# Altium PCB УШЯИ 758727.205-2.PcbDoc (part 3 of 3)
Units mm, origin at the board's own origin, x right, y up, seen from the top; angles counter-clockwise.
Board outline 230 x 150 mm, 2 copper layers (Top Layer, Bottom Layer), stack 1.57 mm thick; 340 components, 190 nets, 1058 pads, 246 vias.
Unrouted connection lines stored in the file: 2.
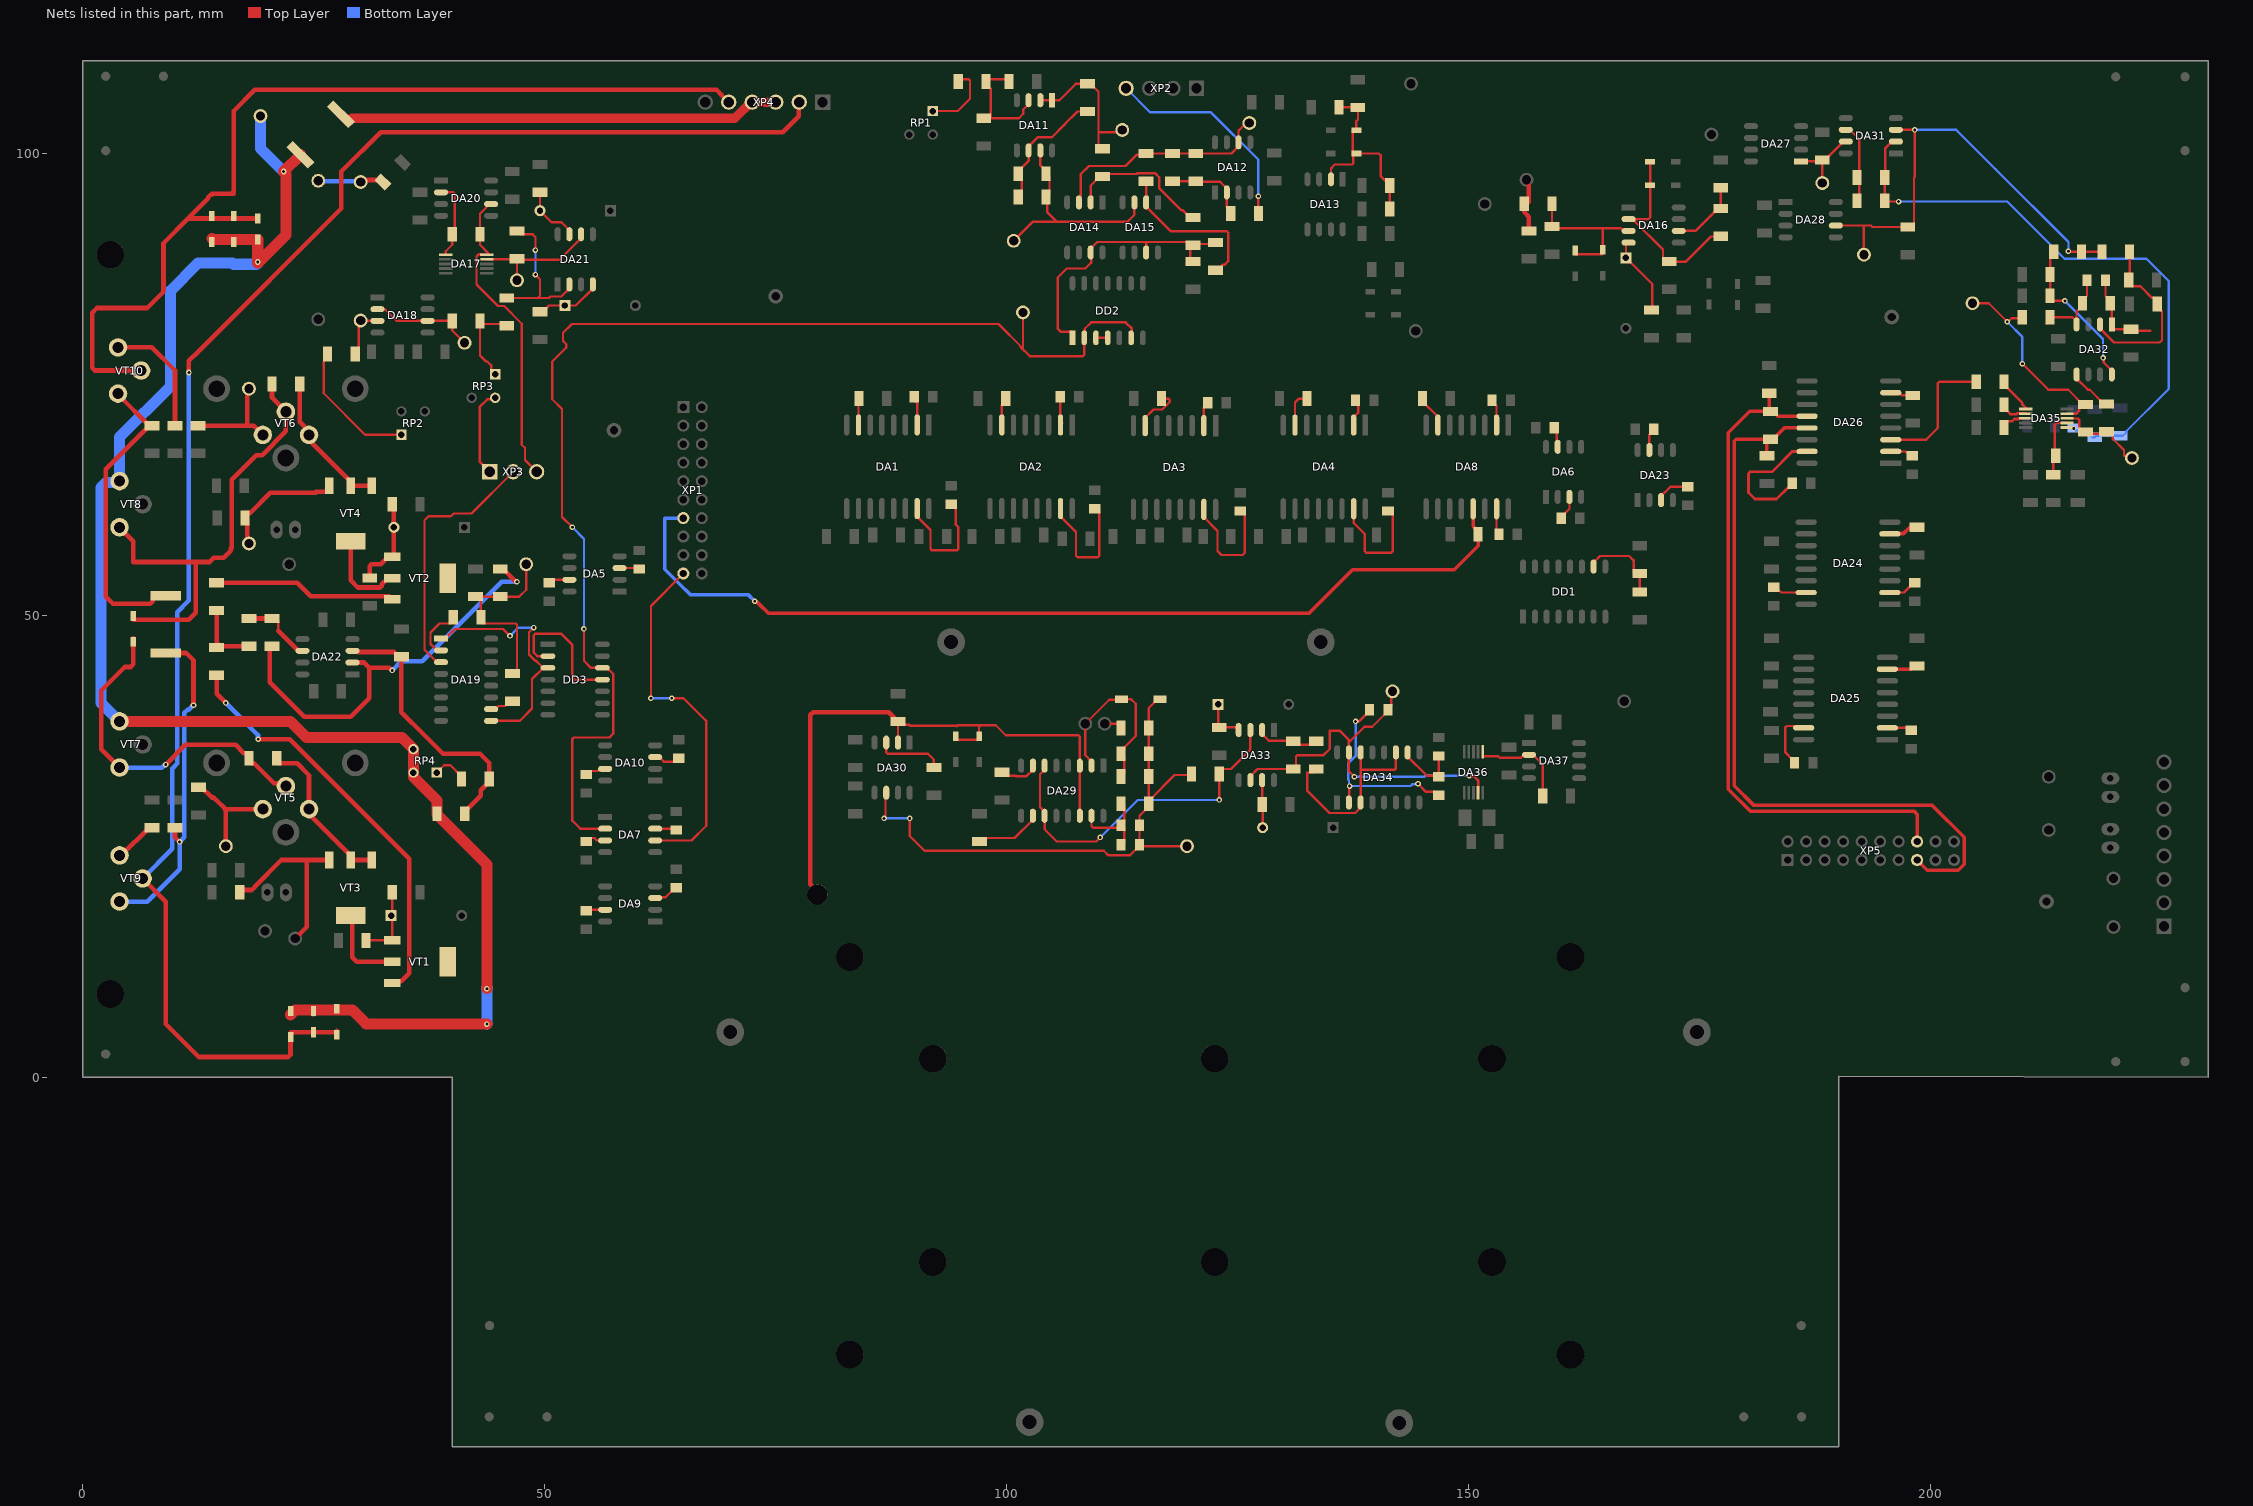
[diagram p3: the nets of this part, all layers, seen from the top]

## Via types
v1: diameter 0.6, hole 0.3, Top Layer to Bottom Layer, 241 vias
v2: diameter 0.5, hole 0.3, Top Layer to Bottom Layer, 3 vias
v3: diameter 1.1, hole 0.8, Top Layer to Bottom Layer, 1 vias
v4: diameter 1.6, hole 0.9, Top Layer to Bottom Layer, 1 vias

## Nets (pads, with @x,y where several pads share a name; then routed paths per layer and width w, separated by ;. In a path a pad name is that pad's centre, name@x,y a point inside that pad or via, vN(x,y) a via of type N, cw(c..) or ccw(c..) an arc to the next point about the centre after c; other vN are vias at no path point) (continued)
LINE-: DA8.13 R17.2 XP1.13 | length 105.2
  Top Layer w0.381: v1(72.725,51.5) 72.767,51.458 72.944,51.458 73.088,51.314 74.227,50.175 132.675,50.175 137.413,54.913 148.414,54.913 151,57.5 R17.2@151,59.05 ; DA8.13@150.46,61.5 150.46,59.59 151.25,58.8 R17.2@151.25,58.75
  Bottom Layer w0.381: XP1.13@65,60.5 63,60.5 63,54.958 63.223,54.735 64.548,53.409 65.733,52.225 72,52.225 v1(72.725,51.5)
Net1: R34.2 R35.1 | length 6.1
  Top Layer w0.5: R34.2@156,94.5 156,93.617 156.5,93.117 R35.1@156.5,91.558 ; R34.2@156.142,94.358 156.482,94.699 156.482,96.606 156.25,96.838 156.25,97.109
Net7: C75.1 | length 2
  Top Layer w0.254: 110.595,38.251 111.985,38.251 112.358,37.878 C75.1@112.358,37.796
Net8: C74.1 C76.1 DA29.2 R82.1 | length 20.2
  Top Layer w0.254: DA29.2@109.175,33.712 109.175,34.171 108.5,34.846 108.5,38.251 111.099,40.85 C74.1@112.2,40.85 ; R82.1@112.358,32.546 112.731,32.919 112.731,34.627 C76.1@112.358,35 112.731,35.373 112.731,35.706 113.95,36.925 113.95,40.406 113.481,40.875 C74.1@112.4,40.875
NetC1_1: C1.1 DA1.15 | length 13.4
  Top Layer w0.254: DA1.15@90.304,61.523 90.25,61.47 90.25,60.719 91.75,59.219 91.75,57.149 91.899,57 94.601,57 94.75,57.149 94.75,59.527 94.498,59.779 94.498,62.002 C1.1@94.25,62.25
NetC2_1: C2.1 DA2.15 | length 13.7
  Top Layer w0.254: DA2.15@105.812,61.523 105.812,60.666 107.5,58.977 107.5,56.399 107.649,56.25 109.851,56.25 110,56.399 110,58.762 109.998,58.764 109.998,61.252 C2.1@109.75,61.5
NetC3_1: C3.1 DA3.15 | length 13
  Top Layer w0.25: DA3.15@121.25,61.25 121.25,60.666 122.809,59.107 122.809,56.941 123.25,56.5 125.5,56.5 125.75,56.75 125.75,60.75 125.75,60.875 125.375,61.25 C3.1@125.25,61.25
NetC4_1: C4.1 DA4.15 | length 12.9
  Top Layer w0.25: DA4.15@137.54,61.5 137.54,59.961 138.75,58.751 138.75,56.896 138.896,56.75 141.604,56.75 141.75,56.896 141.75,60.729 141.75,60.875 141.375,61.25 C4.1@141.25,61.25
NetC5_1: C5.1 DA1.2 | length 2.8
  Top Layer w0.254: C5.1@90,73.232 90.304,72.929 DA1.2@90.304,70.579
NetC6_1: C6.1 DA2.2 | length 2.9
  Top Layer w0.3: C6.1@105.791,73.602 105.791,70.959 DA2.2@106,70.75
NetC7_1: C7.1 DA3.2 | length 2.7
  Top Layer w0.254: DA3.2@121.33,70.5 121.33,72.455 121.75,72.875 C7.1@121.75,73
NetC8_1: C8.1 DA4.2 | length 3
  Top Layer w0.254: DA4.2@137.54,70.556 137.54,71.414 138.015,71.889 138.015,72.985 C8.1@137.75,73.25
NetC9_2: C9.2 DA5.3 | length 2.2
  Top Layer w0.254: DA5.3@58.106,55.09 60.16,55.09 C9.2@60.25,55
NetC10_2: C10.2 DA6.3 | length 2.9
  Top Layer w0.254: C10.2@160,60.25 160,60.625 160.885,61.51 DA6.3@160.885,62.788
NetC11_2: C11.2 DA7.7 | length 2.5
  Top Layer w0.254: DA7.7@61.962,26.885 62.212,26.885 C11.2@64.115,26.885 ; C11.2@64.115,26.885 C11.2@64.25,26.75 C11.2@64.115,26.885
NetC12_1: C12.1 DA8.15 | length 2.9
  Top Layer w0.254: DA8.15@153,61.5 153,59 C12.1@153.25,58.75
NetC13_2: C13.2 DA5.7 | length 2.3
  Top Layer w0.254: C13.2@50.5,53.5 50.82,53.82 DA5.7@52.682,53.82
NetC14_2: C14.2 DA6.7 | length 2.2
  Top Layer w0.254: C14.2@159.25,70.25 159.5,70 159.5,68.996 159.539,68.957 159.539,68.288 DA6.7@159.615,68.212
NetC15_2: C15.2 DA7.3 | length 2.3
  Top Layer w0.254: C15.2@54.5,25.5 54.873,25.873 55.379,25.873 55.383,25.877 55.644,25.615 DA7.3@56.538,25.615
NetC16_1: C16.1 DA8.2 | length 2.7
  Top Layer w0.254: C16.1@152.5,73 152.625,73 153,72.625 DA8.2@153,70.556
NetC17_2: C17.2 DA9.3 | length 2.7
  Top Layer w0.254: DA9.3@61.962,19.385 62.038,19.461 63.086,19.461 64.125,20.5 C17.2@64.25,20.5
NetC18_2: C18.2 DA10.3 | length 2.9
  Top Layer w0.254: DA10.3@61.962,34.635 62.4,34.635 62.9,34.135 64.135,34.135 C18.2@64.5,34.5
NetC19_2: C19.2 DA9.7 | length 2.1
  Top Layer w0.254: C19.2@54.5,18 54.615,18.115 DA9.7@56.538,18.115
NetC20_2: C20.2 DA10.7 | length 2.3
  Top Layer w0.254: C20.2@54.5,32.75 54.873,33.123 55.751,33.123 55.993,33.365 DA10.7@56.538,33.365
NetC21_2: C21.2 DA11.3 R19.1 R20.1 | length 12.5
  Top Layer w0.254: C21.2@97.5,103.75 C21.2@98.25,103.75 ; R20.1@97.75,107.75 98,108 100,108 R19.1@100.25,107.75 ; R20.1@98,107.2 98.25,106.95 C21.2@98.25,103.75 ; DA11.3@102.365,105.712 102.365,105.275 101.791,104.701 101.791,104.248 101.293,103.75 C21.2@98.25,103.75
NetC22_2: C22.2 C25.1 DA13.2 R22.2 R24.1 VD1.1 VD2.2 | length 21.4
  Top Layer w0.254: DA13.2@135.081,97.16 135.081,98.331 135.5,98.75 137.351,98.75 137.5,98.899 VD2.2@137.5,99.75 ; C22.2@135.946,104.948 137.96,104.948 R22.2@137.986,104.923 ; VD2.2@137.446,99.75 137.446,99.948 140.259,99.948 140.486,99.721 140.486,97.453 C25.1@141.446,96.493 R24.1@141.446,93.948 ; VD2.2@137.5,100 137.458,100 137.446,100.012 137.446,102.448 137.752,102.448 137.822,102.518 137.822,103.444 138,103.623 R22.2@138,104.75
NetC23_1: C23.1 DA11.6 R23.2 R26.1 | length 14.5
  Top Layer w0.254: C23.1@101.25,95.25 101.623,95.623 101.623,97.377 R26.1@101.25,97.75 ; R26.1@101.25,97.5 R26.1@101.25,97.75 ; DA11.6@102.344,100.288 102.344,100.705 103.328,101.688 104.872,101.688 106.261,103.077 106.261,103.112 107.649,104.5 R23.2@108.75,104.5 ; DA11.6@102.365,100.288 102.365,99.144 101.644,98.423 101.623,98.423 101.25,98.05 R26.1@101.25,97.75
NetC23_2: C23.2 DA11.7 DA15.3 KT7.1 R26.2 | length 24.3
  Top Layer w0.254: KT7.1@100.75,90.75 101,90.75 102.798,92.548 105.452,92.548 ; DA11.7@103.635,100.288 103.635,98.665 104.25,98.05 R26.2@104.25,97.75 104.623,97.377 104.623,95.623 C23.2@104.25,95.25 104.25,95.081 104.371,94.96 104.371,93.629 105.452,92.548 ; DA15.3@113.811,94.66 113.811,93.311 113.048,92.548 105.452,92.548
NetC24_1: C24.1 DA12.2 R21.2 R25.1 | length 9.1
  Top Layer w0.254: C24.1@117.946,96.948 R25.1@120.446,96.948 120.518,96.876 123.109,96.876 123.811,96.174 123.811,94.165 124.23,93.745 R21.2@124.23,93.445
NetC24_2: C24.2 DA12.6 DA14.3 KT8.1 R25.2 R29.1 | length 24.4
  Top Layer w0.254: DA14.3@107.811,94.986 107.811,95.205 107.993,95.388 107.993,97.695 108.899,98.6 112.848,98.6 114.048,99.801 114.933,99.801 R29.1@115.081,99.948 C24.2@117.946,99.948 R25.2@120.446,99.948 124.306,99.948 125.081,100.723 DA12.6@125.081,101.16 ; DA12.6@125.081,101.16 125.081,102.493 125.156,102.493 125.913,103.25 KT8.1@126.25,103.25
NetC28_2: C28.2 DA16.3 R34.1 VD3.1 VD4.2 | length 16.6
  Top Layer w0.254: R34.1@159,94.5 C28.2@159,92.058 159.283,92.058 159.47,91.871 166.445,91.871 166.743,91.573 DA16.3@167.288,91.573 ; VD3.1@161.5,89.059 164.43,89.059 164.5,89.129 VD4.2@164.5,89.25 ; VD4.2@164.494,89.25 164.494,91.744 164.5,91.75
NetC29_2: C29.2 DD1.10 R33.2 | length 8.9
  Top Layer w0.254: DD1.10@163.5,55.75 163.562,55.75 164.202,56.39 167.36,56.39 167.827,55.923 167.827,54.623 168.2,54.25 R33.2@168.5,54.25 ; C29.2@168.5,52.5 R33.2@168.5,54.25 ; R33.2@168.5,54.5 R33.2@168.5,54.25
NetC30_1: C30.1 DA16.2 R36.1 VD5.2 VD6.1 | length 21.4
  Top Layer w0.254: DA16.2@167.288,92.843 169.444,92.843 169.624,93.023 169.624,98.989 169.635,99 VD6.1@170,99 ; DA16.2@167.726,92.843 171.011,89.557 171.011,88.623 171.384,88.25 R36.1@171.5,88.25 ; R36.1@171.684,88.25 173.5,88.25 176.218,90.968 176.968,90.968 C30.1@177,91
NetC30_2: C30.2 DA16.6 R38.1 | length 7.3
  Top Layer w0.254: DA16.6@172.712,91.573 174.523,91.573 176.95,94 C30.2@177,94 ; C30.2@177.25,94.25 R38.1@177.25,96.25
NetC32_2: C32.2 C33.2 R40.2 | length 7.3
  Top Layer w0.25: R40.2@32.288,97.077 R40.2@32.5,96.865
  Top Layer w0.5: C33.2@30.177,97.077 R40.2@32.288,97.077
  Bottom Layer w0.254: C32.2@25.5,97 C32.2@25.568,96.933 ; C33.2@30.067,96.933 C33.2@30.25,96.75
  Bottom Layer w0.5: C32.2@25.568,96.933 C33.2@30.067,96.933
NetC33_1: C33.1 DA18.3 R41.2 | length 5.7
  Top Layer w0.254: R41.2@29.5,78.25 29.873,78.623 29.873,81.652 C33.1@30.086,81.865 30.102,81.849 31.89,81.849 DA18.3@31.906,81.834
NetC34_1: C34.1 DA17.1 DA20.2 | length 8.5
  Top Layer w0.254: DA20.2@38.788,95.745 40.109,95.745 40.258,95.596 40.258,91.464 C34.1@40,91.206 40,90.065 39.298,89.363 39.298,89.023 DA17.1@39.275,89
NetC34_2: C34.2 DA17.10 DA20.6 XP3.3 | length 34
  Top Layer w0.254: DA17.10@43.478,89.027 42.844,89.027 42.623,88.806 42.623,85.769 44.95,83.443 45.616,83.443 47.526,81.533 47.526,68.441 47.866,68.101 47.866,66.78 XP3.3@49.136,65.51 ; DA17.10@43.725,89 43.851,89 43.828,89.023 43.828,89.236 43,90.065 C34.2@43,91.206 43,93.429 43.699,94.128 43.699,94.292 43.882,94.475 DA20.6@44.212,94.475
NetC37_1: C37.1 KT13.1 R42.2 R43.2 R47.1 | length 20.9
  Top Layer w0.254: C37.1@42.5,52 C37.1@42.727,52 ; R43.2@46.51,43.669 46.627,43.669 47,44.042 47,48.945 46.851,49.094 43.473,49.094 43.1,49.467 43.1,51.627 C37.1@42.727,52 ; KT13.1@48,55.5 48,52.75 47.25,52 R47.1@45.189,52 C37.1@42.727,52
NetC38_2: C38.2 DA21.7 VD10.2 | length 6.5
  Top Layer w0.254: C38.2@49.495,95.745 VD10.2@49.495,93.756 50.747,92.504 51.818,92.504 52.673,91.649 DA21.7@52.673,91.212
NetC39_1: C39.1 DA22.2 R47.2 | length 44.9
  Top Layer w0.5: C39.1@20.5,46.635 20.25,46.385 20.25,42.75 23.996,39.004 29.004,39.004 31,41 31,44.32 ; DA22.2@29.212,44.865 30.455,44.865 31,44.32 ; v1(33.5,44.007) 33.473,44.007 33.16,44.32 31,44.32 ; R47.2@45.189,55 45.489,55 46.879,53.61 v1(47,53.61)
  Bottom Layer w0.5: v1(33.5,44.007) 34.493,45 36.75,45 45.36,53.61 v1(47,53.61)
NetC39_2: C39.2 DA22.6 R51.1 | length 7.8
  Top Layer w0.254: C39.2@20.5,49.635 20.8,49.635 21.173,49.262 21.173,48.313 ; DA22.6@23.35,46.135 DA22.6@23.788,46.135
  Top Layer w0.5: R51.1@18,49.635 C39.2@20.5,49.635 ; 21.173,48.313 DA22.6@23.35,46.135
NetC40_2: C40.2 DA21.4 VD11.1 | length 7.2
  Top Layer w0.254: C40.2@49.5,82.82 49.8,82.82 50.48,83.5 53.362,83.5 55.213,85.351 DA21.4@55.213,85.788
NetC41_1: C41.1 DA22.3 R45.2 R48.1 | length 29.7
  Top Layer w0.5: DA22.3@29.212,46.135 29.649,46.135 29.784,46 33.7,46 34.2,45.5 R45.2@34.5,45.5 34.5,39.5 37,37 39,35 43,35 44,34 R48.1@44,32.25 ; C41.1@41.34,28.5 41.34,28.8 41.59,29.05 41.664,29.05 43.075,30.461 43.075,31.025 R48.1@44,31.95
NetC41_2: C41.2 KT19.1 R64.1 RP4.2 RP4.3 VD15.1 VD16.2 VD17.1 VD18.2 VD19.2 VD20.1 VT7.3 VT8.3 | length 178.9
  Top Layer w1.2: VT7.3@4,38.5 22.5,38.5 24.25,36.75 34.55,36.75 RP4.3@35.8,35.5 RP4.2@35.8,32.96 35.8,32.465 38.34,29.925 C41.2@38.34,28.5 ; VD16.2@14,90.75 14.113,90.637 VD20.1@18.955,90.637 v1@18.955,88.295 ; v1@18.955,88.085 22,91.13 22,97.75 v1(21.75,98) R64.1@23.558,99.808 ; v1(18.955,88.205) v1@18.955,88.295 ; v1@19,88.25 v1@18.955,88.295 ; VD17.1@22.5,6.75 23,7.25 24.89,7.25 VD19.2@25,7.14 25.11,7.25 29.198,7.25 30.698,5.75 v1(43.75,5.75) ; C41.2@38.44,28.3 43.75,22.99 v1(43.75,9.575)
  Bottom Layer w1.2: VT7.3@4,38.5 2,40.5 2,63.797 2.55,64.347 3.847,64.347 VT8.3@4,64.5 4,69.256 9.5,74.756 9.5,85.094 12.491,88.085 16.217,88.085 16.338,87.964 18.834,87.964 v1@18.955,88.085 ; v1@18.75,88 v1(18.955,88.205) ; KT19.1@19.25,104 19.25,100.5 v1(21.75,98) ; v1(43.75,5.75) v1@43.75,9.75
NetC44_1: C44.1 R50.2 VD12.1 VT1.1 | length 8.1
  Top Layer w0.254: R50.2@30.678,14.8 VT1.1@33.5,14.8 VD12.1@33.5,17.487 ; VD12.1@33.387,17.487 33.5,17.6 C44.1@33.5,20
NetC45_2: C45.2 R52.2 VD13.2 VT2.1 | length 10
  Top Layer w0.5: R52.2@31.072,54 31.072,55.312 31.251,55.49 32.24,55.49 33.05,56.3 VT2.1@33.5,56.3 33.687,56.487 VD13.2@33.687,59.5 33.687,61.813 C45.2@33.5,62
NetC48_1: C48.1 VT1.2 VT1.4 VT3.1 VT3.2 VT3.4 VT5.1 | length 26.9
  Top Layer w0.5: C48.1@21,34.5 21,34.25 21.25,34 21.25,33.95 23.207,33.95 24.5,32.657 VT5.1@24.5,29 24.787,28.713 24.787,28.163 29,23.95 VT3.2@29,23.5 VT3.1@31.3,23.5 ; VT3.4@29,17.5 29.182,17.318 29.182,15.311 29.178,15.306 29.178,13.394 29.182,13.39 29.182,12.969 29.651,12.5 VT1.2@33.5,12.5
NetC48_2: C48.2 VD14.2 VT5.2 VT7.1 | length 37.8
  Top Layer w0.5: VT7.1@4,33.5 2,35.5 2,41.845 4.541,44.385 5.199,44.385 5.5,44.687 ; 5.5,44.75 VD14.2@5.5,47.5 ; v1(9,33.827) 11.123,35.95 16.55,35.95 17.45,35.05 17.75,35.05 18,34.8 C48.2@18,34.5 18,34.2 18.25,33.95 18.55,33.95 20.713,31.787 21.713,31.787 VT5.2@22,31.5
  Bottom Layer w0.5: VT7.1@4,33.5 8.579,33.5 8.906,33.827 v1(9,33.827)
NetC49_1: C49.1 VT2.2 VT2.4 VT4.1 VT4.2 VT4.4 VT6.1 | length 25.2
  Top Layer w0.5: C49.1@23.5,75 23.5,70.906 24.5,69.906 VT6.1@24.5,69.5 24.834,69.166 24.834,68.616 29,64.45 VT4.2@29,64 VT4.1@31.3,64 ; VT4.4@29,58 29,53.762 29.777,52.985 32.219,52.985 32.368,53.134 32.368,53.318 33.05,54 VT2.2@33.5,54
NetC49_2: C49.2 VD14.1 VT6.2 VT8.1 | length 49.7
  Top Layer w0.5: VT8.1@3.75,59.75 5.5,58 5.5,55.75 12.25,55.75 ; VD14.1@5.554,49.5 11.5,49.5 12.25,50.25 12.25,55.75 ; 16.044,57.25 16.044,56.962 15.283,56.2 14.206,56.2 13.756,55.75 12.25,55.75 ; 16.155,57.25 16.155,64.662 18.792,67.299 19.421,67.299 22,69.879 VT6.2@22,72 20.5,73.5 C49.2@20.5,75
NetC52_2: C52.2 DA23.3 | length 3.7
  Top Layer w0.254: DA23.3@170.803,62.438 170.803,62.875 171.803,63.875 C52.2@173.668,63.875
NetC53_1: C53.1 DA24.15 | length 3.1
  Top Layer w0.25: C53.1@183.5,52.75 183.81,52.44 DA24.15@186.5,52.44
NetC54_1: C54.1 DA25.15 | length 5.8
  Top Layer w0.254: C54.1@185.25,34 185,34.25 185,34.375 184.25,35.125 184.25,37.851 184.399,38 DA25.15@185.75,38
NetC55_1: C55.1 DA26.15 | length 15.2
  Top Layer w0.3: C55.1@185,64.25 185,64.125 184.65,63.775 184.525,63.775 183.306,62.556 182.708,62.556 180.944,62.556 180.25,63.25 180.25,65.324 180.426,65.5 182.783,65.5 184.993,67.71 DA26.15@186.601,67.71
NetC56_2: C56.2 DA23.7 | length 2.6
  Top Layer w0.25: DA23.7@169.533,67.862 169.533,69.533 169.875,69.875 C56.2@169.875,70.3
NetC57_1: C57.1 DA24.2 | length 3.4
  Top Layer w0.254: DA24.2@195.556,52.44 197.086,52.44 197.752,53.106 197.752,53.127 198.125,53.5 C57.1@198.5,53.5
NetC58_1: C58.1 DA25.2 | length 2.2
  Top Layer w0.3: DA25.2@195.75,37.75 195.8,37.8 197.6,37.8 C58.1@197.85,37.55
NetC59_1: C59.1 DA26.2 | length 2.5
  Top Layer w0.254: DA26.2@195.657,67.71 197.24,67.71 197.327,67.623 197.627,67.623 C59.1@198,67.25
NetC64_1: 
NetC64_2: 
NetC65_1: 
NetC65_2: 
NetC66_2: C71.2 DA29.3 DA29.14 DA30.2 pad.2 VD23.2 VD24.1 | length 64.8
  Top Layer w0.254: DA30.2@88.23,36.213 C71.2@88.23,38.5 88.603,38.127 89.443,38.127 89.538,38.032 94.527,38.032 94.595,37.963 94.708,38.077 97.095,38.077 ; VD24.1@94.5,36.5 96.936,36.5 VD23.2@96.968,36.532 ; VD23.2@97,36.5 97,38 ; 97.095,37.963 97.095,38.077 ; DA29.14@107.905,28.288 DA29.3@107.905,33.712 107.905,36.851 107.756,37 99.881,37 98.804,38.077 97.095,38.077
  Top Layer w0.5: pad.2@79.5,19.75 79.5,20.143 78.75,20.893 78.75,39.207 79.043,39.5 87.25,39.5 C71.2@88,38.75
NetC68_2: 
NetC70_1: C70.1 DA27.1 DA31.7 KT22.1 | length 8.4
  Top Layer w0.254: DA27.1@185.962,99.095 187.655,99.095 C70.1@187.75,99 ; KT22.1@188,96.75 188.25,97 C70.1@188.25,99.25 188.55,99.25 190.275,100.975 DA31.7@190.275,101.059 ; DA31.7@190.75,101.25 190.466,101.25 DA31.7@190.275,101.059 ; DA31.7@190.788,101.241 190.458,101.241 DA31.7@190.275,101.059
NetC72_2: C72.2 DA28.6 DA31.3 KT23.1 R84.1 R85.1 | length 50.2
  Top Layer w0.254: DA28.6@189.707,92.15 192.75,92.15 ; KT23.1@192.75,89.25 192.75,92.15 ; DA31.3@196.212,102.511 198.239,102.511 v1(198.25,102.5) 198.254,102.496 198.254,97.397 198.173,97.316 198.173,92.373 197.55,91.75 C72.2@197.5,91.75 ; C72.2@197.5,92 193.652,92 193.502,92.15 192.75,92.15 ; v1(214.879,89.367) 214.922,89.323 R85.1@216.295,89.323 R84.1@218.5,89.323
  Bottom Layer w0.254: v1(198.25,102.5) 202.75,102.5 207,98.25 214.879,90.371 v1(214.879,89.367)
NetC73_1: C73.1 C87.2 C89.2 C92.2 DA31.2 DA35.1 R86.2 | length 66.4
  Top Layer w0.254: DA31.2@196.212,101.241 195.775,101.241 195.073,100.539 195.073,97.323 195,97.25 R86.2@195,94.845 195.095,94.75 v1(196.5,94.75)
  Bottom Layer w0.254: v1(196.5,94.75) 208.25,94.75 214.452,88.548 223.318,88.548 225.75,86.117 225.75,74.5 221.133,69.883 221.133,69.773 220.76,69.4 217.881,69.4 C92.2@217.731,69.25 217.431,69.25 216.699,69.982 215.663,69.982 C87.2@215.395,70.25 215.179,70.25 C87.2@215.175,70.246
  other v2: 215.45,70.196
NetC73_2: C73.2 DA31.6 R86.1 | length 8.1
  Top Layer w0.254: DA31.6@191.225,102.511 192.25,101.487 192.25,97.895 C73.2@192,97.645 ; R86.1@192,94.845 192.25,95.095 192.25,97.095 C73.2@192,97.345
NetC74_2: C74.2 C75.2 C76.2 C77.2 C78.2 DA30.6 KT24.1 R82.2 R83.2 R89.1 | length 61.5
  Top Layer w0.254: v1(86.73,28.001) 86.884,28.155 86.884,30.713 DA30.6@86.96,30.789 ; v1(89.5,28.001) 89.5,26.096 91.096,24.5 110.5,24.5 111,24 113.358,24 113.358,24.037 114.358,25.037 C78.2@114.358,25.162 ; C74.2@116.475,40.725 116.15,40.725 115.358,39.933 C75.2@115.358,37.796 C76.2@115.358,35 R82.2@115.358,32.546 R83.2@115.358,29.892 ; KT24.1@119.5,25.25 119.25,25 114.521,25 C78.2@114.358,25.162 ; R89.1@119.9,32.7 118.167,32.7 R83.2@115.358,29.892 ; C78.2@114.358,25.162 C77.2@114.358,27.267 114.358,28.292 115.358,29.292 R83.2@115.358,29.592 R83.2@115.358,29.892
  Bottom Layer w0.254: v1(86.73,28.001) v1(89.5,28.001)
NetC77_1: C77.1 C78.1 DA29.15 R83.1 | length 9.5
  Top Layer w0.254: DA29.15@109.175,28.288 109.175,27.149 109.324,27 112.092,27 C77.1@112.358,27.267 ; C78.1@112.358,25.162 112.731,25.535 112.731,26.894 C77.1@112.358,27.267 ; R83.1@112.358,29.592 112.731,29.219 112.731,27.639 C77.1@112.358,27.267
NetC81_1: C81.1 DA32.2 R84.2 R87.1 | length 19.6
  Top Layer w0.254: DA32.2@218.299,81.462 218.299,81.024 219.824,79.5 224.75,79.5 225,79.75 225,82.845 224.158,83.687 224.158,84.287 224.122,84.323 223.927,84.323 222.673,85.577 221.768,85.577 221.395,85.95 R87.1@221.395,86.25 221.5,86.355 R84.2@221.5,89.323
NetC82_2: C82.2 DA32.8 R85.2 R88.2 | length 16.9
  Top Layer w0.254: R85.2@213.09,89.408 213.09,88.818 212.895,88.623 R88.2@212.895,86.85 C82.2@212.895,84.55 212.895,84.373 213.268,84 v1(214.5,84) ; v1(218.624,77.83) 218.69,77.764 218.69,77.354 219.569,76.476 DA32.8@219.569,76.038
  Bottom Layer w0.254: v1(214.5,84) 218.624,79.876 v1(218.624,77.83)
NetC83_1: C83.1 DA32.1 R90.2 R92.1 | length 9.6
  Top Layer w0.254: C83.1@218.895,86.25 218.895,84.55 219.395,84.05 R92.1@219.395,83.75 219.569,83.576 219.569,81.128 219.767,80.93 R90.2@221.663,80.93 ; R90.2@221.75,80.75 223.75,80.75
NetC83_2: C83.2 DA32.4 R92.2 R99.1 | length 9.1
  Top Layer w0.254: R99.1@212.522,81.551 212.895,81.924 R99.1@212.895,82.224 215.327,82.224 DA32.4@215.759,81.792 ; DA32.4@215.759,81.462 DA32.4@215.759,81.792 ; C83.2@216.895,86.25 216.895,84.55 216.395,84.05 R92.2@216.395,83.75 216.395,83.45 215.759,82.814 DA32.4@215.759,81.792
NetC84_2: C84.2 DA33.4 VD26.1 | length 4.8
  Top Layer w0.254: VD26.1@122.877,40.347 122.877,37.97 C84.2@123,37.847 124.912,37.847 125.095,37.664 DA33.4@125.095,37.559
NetC85_2: C85.2 DA33.7 VD25.2 | length 5.2
  Top Layer w0.254: DA33.7@127.635,32.135 C85.2@127.635,29.5 127.687,29.448 VD25.2@127.687,27
NetC86_1: C86.1 DA33.2 R91.1 | length 6.9
  Top Layer w0.254: DA33.2@127.635,37.559 127.635,37.121 128.341,36.415 130.932,36.415 C86.1@131,36.347 131.3,36.347 131.673,35.974 132.627,35.974 ; 132.627,35.974 133.127,35.974 R91.1@133.5,36.347
NetC86_2: C86.2 DA33.6 DA34.15 DA36.9 KT25.1 R96.2 | length 43
  Top Layer w0.254: DA33.6@126.365,32.135 126.365,32.572 127.139,33.347 131.3,33.347 131.3,34.698 131.449,34.847 134.275,34.847 134.947,35.519 134.947,37.5 135.991,37.5 137.022,36.468 137.022,36.25 ; v1(137.615,32.5) 137.022,33.093 DA34.15@137.022,35.15 137.022,36.25 ; KT25.1@141.75,41.75 141.623,41.623 141.623,40.248 141.551,40.176 140.949,40.176 140.949,39.324 139.552,37.927 138.699,37.927 137.022,36.25 ; v1(150.049,32.606) 150.115,32.54 150.577,32.54 151,32.118 DA36.9@151,30.775
  Bottom Layer w0.254: v1(137.615,32.5) 145.157,32.5 145.263,32.606 v1(150.049,32.606)
NetC90_1: C90.1 DA35.4 KT27.1 R99.2 | length 22.6
  Top Layer w0.254: KT27.1@204.5,83.75 206.25,83.75 v1(208.25,81.75) 208.344,81.75 208.723,82.129 209.8,82.129 R99.2@209.895,82.224 ; v1(209.895,77.191) 212.713,74.373 214.858,74.373 C90.1@216.431,72.8 ; DA35.4@214.725,71.796 215.205,71.796 215.232,71.769 215.7,71.769 216.058,72.127 216.058,72.427 C90.1@216.431,72.8 ; C90.1@216.731,72.8 C90.1@216.431,72.8
  Bottom Layer w0.254: v1(208.25,81.75) 209.895,80.105 v1(209.895,77.191)
NetC90_2: C90.2 DA35.3 KT26.1 R95.2 | length 10.1
  Top Layer w0.254: DA35.3@214.725,71.296 214.992,71.296 215.023,71.265 215.879,71.265 215.894,71.25 215.945,71.25 216.058,71.137 216.058,70.173 216.431,69.8 C90.2@216.731,69.8 216.895,69.637 218.786,69.637 R95.2@219,69.85 ; R95.2@219,69.75 219.4,69.75 219.673,69.477 219.673,69.077 220.888,67.862 220.888,67.233 221.517,67.233 KT26.1@221.75,67
NetC93_1: C93.1 DA35.2 R101.1 | length 7
  Top Layer w0.254: C93.1@213.229,65.176 213.229,66.979 R101.1@213.5,67.25 213.395,67.355 213.395,70.601 213.59,70.796 DA35.2@214.725,70.796
NetC96_1: C96.1 DA36.1 DA37.2 | length 10.4
  Top Layer w0.254: 151.65,34.721 153.17,34.721 153.334,34.556 155.637,34.556 155.969,34.888 DA37.2@156.513,34.888 156.951,34.888 158,33.838 C96.1@158,30.437
NetDA1_7: DA1.7 R13.2 | length 2.7
  Top Layer w0.254: DA1.7@83.954,70.579 83.954,73.171 R13.2@84.015,73.232
NetDA2_7: DA2.7 R14.2 | length 3
  Top Layer w0.254: DA2.7@99.462,70.579 99.462,72.691 99.898,73.127 R14.2@99.898,73.427
NetDA3_7: DA3.7 R15.2 | length 5.4
  Top Layer w0.254: DA3.7@114.98,70.5 114.98,71.358 115.866,72.244 116.817,72.244 117.641,73.068 117.641,73.278 117.492,73.427 R15.2@116.741,73.427
NetDA4_7: DA4.7 R16.2 | length 3.9
  Top Layer w0.254: DA4.7@131.19,70.556 131.19,72.999 131.618,73.427 R16.2@132.499,73.427
NetDA8_7: DA8.7 R18.2 | length 3.4
  Top Layer w0.254: R18.2@145,73.25 145,73.108 146.65,71.458 DA8.7@146.65,70.556
NetDA11_1: DA11.1 DA11.2 KT6.1 R23.1 R28.1 | length 16.5
  Top Layer w0.254: DA11.2@103.635,105.712 DA11.1@104.905,105.712 105.696,105.712 107.484,107.5 109.05,107.5 109.927,106.623 109.927,102.324 ; R28.1@110.351,100.448 110.3,100.448 109.927,100.821 109.927,102.324 ; KT6.1@112.5,102.5 112.262,102.262 111.513,102.262 111.49,102.238 111.478,102.25 110.001,102.25 109.927,102.324
NetDA14_2: DA14.2 R28.2 R30.1 | length 16.1
  Top Layer w0.254: DA14.2@109.081,94.66 109.081,96.478 110.051,97.448 R28.2@110.351,97.448 110.626,97.723 114.022,97.723 114.124,97.825 116.037,97.825 116.486,97.377 116.486,96.211 118.902,93.794 119.075,93.794 119.848,93.021 R30.1@120.148,93.021
NetDA14_7: DA14.7 DA15.7 DD2.1 R30.2 R31.2 R32.1 | length 31.6
  Top Layer w0.25: DD2.1@107.03,80.582 107.03,80.082 DD2.1@107.112,80
  Top Layer w0.254: DD2.1@107.03,80.582 106.939,80.673 105.827,80.673 105.5,81 105.5,86.5 106.5,87.5 108.5,87.5 109.125,88.125 DA14.7@109.125,89.1 ; DA14.7@109.081,89.236 109.081,89.674 109.783,90.376 114.944,90.376 ; DA15.7@115.081,89.236 115.081,90.239 114.944,90.376 ; R32.1@120.821,87.877 120.448,88.25 R32.1@120.148,88.25 119.848,88.55 119.848,89.721 R30.2@120.148,90.021 ; R31.2@122.586,90.31 122.424,90.148 120.275,90.148 R30.2@120.148,90.021 ; 114.944,90.376 119.793,90.376 R30.2@120.148,90.021
NetDA15_2: DA15.2 R29.2 R31.1 | length 17.7
  Top Layer w0.254: R29.2@115.081,96.948 DA15.2@115.081,94.66 115.081,94.223 117.783,91.521 123.818,91.521 123.967,91.372 123.967,88.303 123.563,87.899 123.363,87.899 123.259,87.794 123.259,87.683 122.886,87.31 R31.1@122.586,87.31
NetDA16_4: DA16.4 R37.2 VD7.1 | length 9.1
  Top Layer w0.254: R37.2@169.75,83 169.836,83.086 169.836,85.822 168.595,87.064 VD7.1@167,88.658 DA16.4@167,90.12 ; DA16.4@167,90.12 DA16.4@167.183,90.303 ; DA16.4@167,90.12 DA16.4@167.183,90.303 ; DA16.4@167.183,90.303 DA16.4@167.288,90.303 DA16.4@167.183,90.303
NetDA17_9: DA17.9 DA21.6 KT14.1 R49.1 | length 13.8
  Top Layer w0.254: DA17.9@43.725,88.5 R49.1@46.935,88.5 ; KT14.1@47,86.226 47,88.282 R49.1@47.141,88.423 ; R49.1@47,88.565 47.1,88.465 51.633,88.465 53.943,90.774 DA21.6@53.943,91.212
NetDA18_2: DA18.2 DA18.6 KT12.1 R44.2 | length 11.5
  Top Layer w0.254: DA18.2@31.906,83.104 32.725,83.104 33.995,81.834 DA18.6@37.33,81.834 R44.2@40,81.834 40,80.8 KT12.1@41.335,79.465
NetDA19_1: DA19.1 DA19.9 DD3.3 | length 27
  Top Layer w0.254: DA19.1@39.225,47.445 40.28,48.5 45.5,48.5 v1(46.25,47.75) ; DA19.9@44.212,38.555 47.305,38.555 48.635,39.885 48.635,43.075 49.85,44.29 DD3.3@50.35,44.29 ; v1(48.808,48.649) 48.306,48.147 48.306,45.731 48.994,45.044 49.096,45.044 49.89,44.25 DD3.3@50.5,44.25
  Bottom Layer w0.254: v1(46.25,47.75) 47.149,48.649 v1(48.808,48.649)
NetDA19_2: DA19.2 R42.1 | length 6
  Top Layer w0.254: DA19.2@38.788,46.175 38.35,46.175 37.648,46.877 37.648,48.127 38.615,49.094 39.727,49.094 40.1,49.467 R42.1@40.1,49.767
NetDA19_3: DA19.3 XP3.2 | length 28.1
  Top Layer w0.254: DA19.3@38.788,44.905 38.35,44.905 37,46.256 37,60.26 37.434,60.694 39.868,60.694 40.17,60.995 42.081,60.995 XP3.2@46.596,65.51
NetDA19_10: DA19.10 R43.1 | length 2.6
  Top Layer w0.254: DA19.10@44.212,39.825 44.653,39.825 44.996,40.169 45.71,40.169 46.21,40.669 R43.1@46.51,40.669
NetDA21_2: DA21.2 R46.1 R49.2 | length 16.8
  Top Layer w0.254: R46.1@45.906,84.32 49.265,84.32 ; R49.2@47,91.565 47.373,91.192 48.703,91.192 49,90.895 v1(49,89.5) ; v1(49,86.85) 49.5,86.35 49.5,84.555 49.265,84.32 ; DA21.2@52.673,85.788 52.673,85.351 51.799,84.477 50.611,84.477 50.453,84.32 49.265,84.32
  Bottom Layer w0.254: v1(49,86.85) v1(49,89.5)
NetDA24_7: DA24.7 R72.2 | length 3.2
  Top Layer w0.381: DA24.7@195.556,58.79 196.414,58.79 196.452,58.828 197.028,58.828 197.7,59.5 R72.2@198.5,59.5
NetDA25_7: DA25.7 R73.2 | length 3.4
  Top Layer w0.381: DA25.7@195.286,44.15 197.85,44.15 198.2,44.5 R73.2@198.5,44.5
NetDA26_7: DA26.7 R74.2 | length 2.5
  Top Layer w0.25: DA26.7@195.657,74.06 196.565,74.06 196.85,73.775 R74.2@198.025,73.775
NetDA29_6: DA29.6 DA29.11 DA33.3 R89.2 | length 38.1
  Top Layer w0.254: DA29.6@104.095,33.712 104.095,33.274 103.595,32.775 103.595,29.226 104.095,28.725 104.095,26.825 105.416,25.504 109.682,25.504 v1(110.12,25.942) ; v1(123,30) 123,32.502 123,32.974 123.373,33.347 124.267,33.347 126.365,35.445 DA33.3@126.365,37.559
  Bottom Layer w0.254: v1(110.12,25.942) 114.178,30 v1(123,30)
NetDA29_7: DA29.7 R93.1 | length 4.2
  Top Layer w0.254: R93.1@99.5,33 99.8,33 100.173,32.627 100.982,32.627 101.037,32.573 102.123,32.573 102.825,33.274 DA29.7@102.825,33.712
NetDA29_10: DA29.10 R94.1 | length 7.2
  Top Layer w0.254: R94.1@97.05,25.5 97.5,25.5 97.873,25.873 100.835,25.873 102.825,27.863 DA29.10@102.825,28.288
NetDA30_3: DA30.3 R81.2 | length 7.4
  Top Layer w0.254: DA30.3@86.96,36.213 86.96,35.153 87.109,35.004 91.473,35.004 92.095,34.382 92.095,33.532 R81.2@92.126,33.501
NetDA32_5: DA32.5 R95.1 | length 4.5
  Top Layer w0.254: DA32.5@215.759,76.038 215.759,75.601 216.986,74.374 217.176,74.374 R95.1@218.7,72.85
NetDA34_2: DA34.2 R96.1 R97.2 | length 21.6
  Top Layer w0.254: DA34.2@137.022,29.726 137.06,29.764 137.06,31.462 v1(137.098,31.5) ; v1(137.75,38.5) 138.125,38.5 139.25,39.625 R96.1@139.25,39.75 ; v1(144.5,31.75) 145.377,30.873 146.252,30.873 146.625,30.5 R97.2@146.75,30.5
  Bottom Layer w0.254: v1@137,31.5 137.032,31.532 137.032,32.126 136.938,32.22 136.938,33.951 137.75,34.762 v1(137.75,38.5) ; v1(137.098,31.5) 143.692,31.5 143.876,31.684 144.434,31.684 v1(144.5,31.75)
NetDA34_3: DA34.3 DA34.11 DA34.14 R91.2 | length 21.8
  Top Layer w0.254: R91.2@133.5,33.347 133.127,32.974 132.5,32.974 132.5,31.015 134.932,28.583 137.714,28.583 138.063,28.932 138.063,28.952 138.292,29.182 138.292,33.25 ; DA34.14@138.292,35.15 138.292,33.25 ; DA34.11@142.102,35.15 142.102,33.399 141.954,33.25 138.292,33.25
NetDA34_10: DA34.10 R97.1 R98.2 | length 7
  Top Layer w0.254: DA34.10@143.372,35.15 143.372,34.713 145.462,32.623 146.627,32.623 R97.1@146.75,32.5 R98.2@146.75,34.75
NetDA35_6: DA35.6 R104.1 | length 3.9
  Top Layer w0.254: R104.1@207.895,75.25 207.895,74.95 209.895,72.95 209.895,72.777 210.252,72.42 210.252,72.319 DA35.6@210.275,72.296
NetDA35_7: DA35.7 R103.1 | length 3
  Top Layer w0.254: R103.1@207.895,72.75 207.895,72.45 208.595,71.75 209.252,71.75 209.324,71.823 210.275,71.823 DA35.7@210.275,71.796
NetDA35_8: DA35.8 R102.1 | length 3
  Top Layer w0.254: R102.1@207.895,70.296 207.895,70.596 208.268,70.969 208.783,70.969 209.06,71.246
  Top Layer w0.3: 209.06,71.223 209.47,71.223 209.543,71.296 DA35.8@210.275,71.296
NetDD2_3: DD2.3 DD2.4 | length 1.3
  Top Layer w0.254: DD2.3@109.652,80 DD2.4@110.922,80
NetDD3_2: DD3.2 DD3.11 | length 15.2
  Top Layer w0.254: DD3.2@50.35,45.56 49.19,45.56 48.81,45.94 48.81,47.81 49,48 51.75,48 53,46.75 53,43.25 53.23,43.02 DD3.11@56.25,43.02
NetKT16_1: KT16.1 R56.2 VT4.3 | length 13.8
  Top Layer w0.5: KT16.1@17.809,57.816 17.809,60.264 R56.2@17.573,60.5 17.573,60.8 17.823,61.05 18.123,61.05 20.323,63.25 25.25,63.25 ; 25.25,63.35 26.5,63.35 26.7,63.55 VT4.3@26.7,64
NetKT17_1: KT17.1 R57.1 VT5.3 | length 12
  Top Layer w0.5: R57.1@12.55,31.375 12.85,31.375 13.957,30.268 14.157,30.268 14.375,30.05 14.425,30.05 15.5,28.975 KT17.1@15.5,25 ; 15.4,29 17.175,29 VT5.3@19.5,29
NetKT18_1: KT18.1 R58.2 VT6.3 | length 11.5
  Top Layer w0.5: R58.2@12.5,70.5 17.83,70.5 ; KT18.1@18,74.5 17.83,74.33 17.83,70.5 ; VT6.3@19.5,69.5 18.5,70.5 17.83,70.5
NetR20_2: R20.2 RP1.1 | length 8
  Top Layer w0.254: RP1.1@92,104.54 94.689,104.54 96.03,105.881 96.03,107.851 95.881,108 95,108 R20.2@94.75,107.75
NetR21_1: R21.1 XP2.4 | length 23.3
  Top Layer w0.254: R21.1@127.23,93.445 v1(127.23,95.325)
  Bottom Layer w0.254: XP2.4@112.92,107 115.52,104.4 122.1,104.4 127.23,99.27 v1(127.23,95.325)
NetR41_1: R41.1 RP2.1 | length 14.7
  Top Layer w0.254: R41.1@26.5,78.25 26.127,77.877 26.127,77.461 26.094,77.428 26.094,74 30.594,69.5 RP2.1@34.5,69.5
NetR44_1: R44.1 R46.2 RP3.1 | length 9.7
  Top Layer w0.254: RP3.1@44.64,76.046 44.207,76.479 44.207,77.027 43.79,77.444 43.651,77.444 43,78.094 R44.1@43,81.834 43.334,81.5 45.726,81.5 R46.2@45.906,81.32
NetR48_2: R48.2 RP4.1 | length 3.8
  Top Layer w0.254: RP4.1@38.34,32.96 39.132,33.752 39.798,33.752 41,32.55 R48.2@41,32.25
NetR51_2: R51.2 R54.1 R55.2 | length 7.2
  Top Layer w0.5: R55.2@14.5,50.5 14.5,47 14.865,46.635 R51.2@18,46.635
NetR53_2: R53.2 VT3.3 | length 20.5
  Top Layer w0.5: R53.2@16.75,20 17.004,20.254 18.315,20.254 18.616,20.556 18.616,20.616 21.5,23.5 24.25,23.5 ; 23,15 24.25,16.25 24.25,23.5 ; VT3.3@26.75,23.5 24.25,23.5
NetR54_2: R54.2 VT1.3 | length 45.2
  Top Layer w0.5: R54.2@14.5,43.5 14.5,41.5 v1(15.5,40.5) ; v1(19,36.577) 22.423,36.577 35.353,23.647 35.353,11.253 34.5,10.4 33.7,10.4 VT1.3@33.5,10.2
  Bottom Layer w0.5: v1(15.5,40.5) 18.981,37.019 18.981,36.596 v1(19,36.577)
NetR55_1: R55.1 VT2.3 | length 19.7
  Top Layer w0.5: R55.1@14.5,53.5 23.212,53.5 24.689,52.023 33.177,52.023 VT2.3@33.5,51.7
NetR59_1: R59.1 R61.2 VT10.1 | length 33
  Top Layer w0.5: VT10.1@3.832,73.963 3.832,73.868 R61.2@7.2,70.5 ; R61.2@7.5,70.5 R61.2@7.2,70.5 ; R59.1@9,52.1 7.85,52.1 7.6,51.85 7.6,51.506 7.307,51.213 3.287,51.213 2.5,52 2.5,65.8 R61.2@7.2,70.5
NetR59_2: R59.2 R60.1 VT9.1 | length 36.4
  Top Layer w0.5: R59.2@9,45.9 11.207,45.9 12,45.107 v1(12,40.25) ; R60.1@10,27 10,25.95 v1(10.5,25.45)
  Bottom Layer w0.5: VT9.1@4,19 7,19 10.5,22.5 v1(10.5,25.45) 11,25.95 11,39.411 11.354,39.765 11.488,39.765 11.973,40.25 v1(12,40.25)
NetR62_1: R62.1 VT9.3 | length 4.7
  Top Layer w0.5: VT9.3@4,24 4.2,24 7.2,27 R62.1@7.5,27
NetR63_2: R63.2 VT10.3 | length 13.2
  Top Layer w0.5: VT10.3@3.832,78.963 7.5,78.963 10,76.463 R63.2@10,70.5
NetR64_2: R64.2 XP4.3 XP4.4 | length 48.3
  Top Layer w1: R64.2@27.942,104.192 28.755,103.379 29.126,103.75 70.572,103.75 72.322,105.5 XP4.3@75,105.5
NetRP3_2: RP3.2 XP3.1 | length 9.5
  Top Layer w0.254: XP3.1@44.056,65.51 42.96,66.606 42.96,72.514 43.787,73.341 44.474,73.341 RP3.2@44.64,73.506
NetVD15_2: VD15.2 VD17.2 VD19.1 VT9.2 XP4.2 | length 177.4
  Top Layer w0.5: VT9.2@6.5,21.5 9,19 9,5.75 12.563,2.187 22.251,2.187 22.5,2.436 VD17.2@22.5,4.497 ; v1(11.5,76.25) 11.5,77.5 12.5,78.5 ; 12.625,78.625 28,94 28,98 32.25,102.25 75.75,102.25 77.5,104 XP4.2@77.5,105.269 ; VD17.2@22.554,4.875 27.446,4.875 27.5,4.928 VD15.2@27.5,5
  Bottom Layer w0.5: VT9.2@6.5,21.5 9.7,24.7 9.7,33.396 10.25,33.946 10.25,50.328 11.5,51.578 v1(11.5,76.25)
NetVD16_1: VD16.1 VD18.1 VD20.2 VT10.2 XP4.5 | length 106.8
  Top Layer w0.25: 69.234,106.186 XP4.5@69.92,105.5
  Top Layer w0.5: VT10.2@6.332,76.463 1.33,76.463 1.037,76.756 1.037,82.713 1.556,83.231 6.981,83.231 8.75,85 8.75,90.25 11.5,93 ; 14,95.5 13.865,95.5 13.605,95.24 13.605,95.105 11.5,93 ; 14,95.59 16.25,95.59 16.338,95.59 ; 16.25,95.75 16.338,95.838 16.338,104.545 18.618,106.825 68.595,106.825 69.234,106.186 ; VD20.2@18.955,92.917 11.583,92.917 11.5,93 ; XP4.5@69.609,105.5 XP4.5@69.92,105.5
OVLW: DA7.2 DD2.2 DD2.6 DD3.12 KT10.1 | length 136.9
  Top Layer w0.254: v1(53,59.5) 51.878,60.622 51.878,72.302 50.823,73.358 50.823,77.43 52.334,78.942 52.334,79.304 51.987,79.652 51.987,80.543 52.947,81.504 99.117,81.504 101.685,78.935 ; v1(54.25,48.5) 54.25,45.053 55.013,44.29 55.96,44.29 DD3.12@56,44.25 ; DD3.12@56.25,44.29 56.75,44.29 57.427,43.613 57.427,39 57.427,37.177 57,36.75 53.149,36.75 53,36.601 53,27.75 53.865,26.885 DA7.2@56.538,26.885 ; 101.5,79 102.5,78 108.233,78 108.382,78.149 DD2.2@108.382,80 108.448,80.066 108.448,80.988 109.137,81.677 112.863,81.677 113.54,81 113.528,80.988 113.528,80.066 DD2.6@113.462,80 ; 101.75,79 KT10.1@101.75,82.75
  Bottom Layer w0.254: v1(53,59.5) 54.25,58.25 v1(54.25,48.5)
OVLWn: DA7.6 XP1.19 | length 39.5
  Top Layer w0.254: v1(61.5,41) 61.5,51 XP1.19@65,54.5 ; DA7.6@61.962,25.615 65.885,25.615 67.477,27.207 67.477,35.949 67.477,38.551 67.051,38.977 65.028,41 v1(63.75,41)
  Bottom Layer w0.254: v1(61.5,41) v1(63.75,41)
RUN_ADU: DA26.3 R104.2 | length 14.7
  Top Layer w0.254: DA26.3@195.657,68.98 199.48,68.98 200.746,70.246 200.746,70.496 200.75,70.5 200.75,75.101 200.899,75.25 R104.2@204.895,75.25
RUN_ADU+: DA26.12 R66.2 R71.1 XP5.16 | length 74.7
  Top Layer w0.381: R66.2@182.5,74 182.5,72.25 R71.1@182.619,72.131 ; R71.1@182.75,72 182.966,72 183.446,71.52 DA26.12@186.601,71.52 ; R71.1@182.75,72.039 180.393,72.039 178.083,69.729 178.083,31.167 180.5,28.75 198.219,28.75 198.5,28.469 XP5.16@198.5,25.5
RUN_ADU-: DA26.13 R68.1 R71.2 XP5.15 | length 82.9
  Top Layer w0.381: R68.1@182.25,67.25 R71.2@182.25,69 ; R71.2@182.25,69.039 178.941,69.039 178.718,68.815 178.718,31.532 180.85,29.4 200.142,29.4 203.591,25.952 203.591,23.048 202.952,22.409 199.591,22.409 XP5.15@198.5,23.5 ; R71.2@182.75,69 182.889,69 184.139,70.25 DA26.13@186.601,70.25
pads on no net: 1.1 2.1 4.1 5.1 6.1 7.1 8.1 9.1 10.1 11.1 12.1 13.1 14.1 20.2 21.2 25.1 26.1 27.1 28.1 DA1.6 DA1.10 DA1.11 DA1.14 DA2.6 DA2.10 DA2.11 DA2.14 DA3.6 DA3.10 DA3.11 DA3.14 DA4.6 DA4.10 DA4.11 DA4.14 DA8.3 DA8.10 DA8.11 DA8.14 DA12.1 DA12.5 DA12.8 DA13.5 DA13.6 DA14.5 DA14.6 DA15.5 DA15.6 DA16.1 DA16.5 DA16.8 DA17.7 DA18.1 DA18.5 DA18.8 DA19.6 DA19.7 DA19.8 DA19.14 DA19.15 DA19.16 DA20.1 DA20.5 DA20.8 DA21.1 DA21.5 DA21.8 DA22.1 DA22.5 DA22.8 DA24.3 DA24.10 DA24.11 DA24.14 DA25.6 DA25.10 DA25.11 DA25.14 DA26.6 DA26.10 DA26.11 DA26.14 DA27.4 DA27.5 DA28.1 DA28.3 DA28.5 DA28.7 DA28.8 DA30.1 DA30.5 DA30.8 DA31.1 DA31.5 DA31.8 DA32.7 DA33.1 DA33.5 DA33.8 DA34.6 DA34.7 DA34.8 DA36.7 DA37.1 DA37.5 DA37.8 DD1.1 DD1.9 DD1.15 DD2. DD2.8 DD2.9 DD2.10 DD2.11 DD2.12 DD2.13 DD3. DD3.4 DD3.5 DD3.6 DD3.8 DD3.9 DD3.10 KT15.1 XP2.3 XP4.1 XP5.1 XP5.2 XP5.3 XP5.4 XP5.5 XP5.18 XP5.19 XP5.20

## Polygon pours and split planes (outlines as drawn)
GND on Bottom Layer "Main_GND" (solid, remove dead copper, pour order 5): 173.25,6.75 173.25,18.711 205.5,18.711 205.5,32.75 204.75,33.5 189,33.5 189,77 190.25,78.25 177.5,78.25 177.5,76.5 175.276,76.5 174.75,75.974 174.75,65.25 166.803,65.25 165.946,66.107 157.498,66.107 157.593,65.895 144.749,65.895 144.354,65.5 143.233,66.621 129.129,66.621 127.75,68 78.75,68 76.25,70 76.25,76.5 73.75,79 59.114,79 59.057,79.057 59,79 55.926,79.074 51.693,74.842 51.693,58.5 52.266,58.5 61.945,48.821 61.945,19 61.973,18.973 61.979,17.5 51,6.5 15.75,6.5 15.75,28.25 15.5,28.5 15.75,28.75 15.75,86.822 33.428,104.5 58.6,104.5 63.1,109 67.547,109 69.25,107.297 69.25,101.795 67.213,99.758 67.492,99.758 67.234,99.5 60.569,99.5 60.569,88.931 62.25,87.25 80,87.25 89.75,77.5 102.048,77.5 102.548,77 102.75,77.202 102.75,77.25 103,77.5 113.613,77.5 113.616,77.503 113.616,87.704 109.831,91.489 109.831,96.748 110.358,97.276 126.351,97.276 126.351,97.36 146.199,97.36 146.809,96.75 154.25,96.75 154.25,94.386 163,94.386 164.076,93.311 164.076,87.345 164.405,87.345 166.904,84.846 169.225,84.846 169.321,84.75 178,84.75 180.11,86.86 180.11,92.106 180.178,92.174 198.292,92.208 199,91.5 199,87.25 218.069,87.25 218.037,87.218 218.204,87.05 225.25,87.05 225.25,76.75 224.5,76 224.5,58.25 224.197,57.947 204.197,57.947 203.25,57 203.25,43.68 215,43.68 215,14.517 214,13.517 214,6.75
GND on Bottom Layer "GND_Under_Defence" (solid, pour order 0): 70,47.15 174.875,47.15 174.87,46.5 174.87,-38.39 174.76,-38.5 70,-38.5

## Keep-outs
Keep-Out Layer:
  region: 6.1,94.1 6.1,96.964 6.1,83.978 0,83.978 0,94.1
  region: 5.975,14.164 5.975,10.864 5.975,4.25 0.025,4.25 0.025,14.164
  lines w0.3: 0.166,96.866 13.511,96.866 13.511,109.838 ; 40,-24.103 53,-24.103 53,-40.006 ; 176.866,-40 176.866,-23.849 190,-23.849 ; 216.979,110 216.979,96.655 229.951,96.655 ; 217,0.028 217,13 230.134,13

## Other copper
Top Layer:
  pour cut-out: 23,48 29.75,48 30,47.75 30,42.75 23,42.75 22.75,43
  pour cut-out: 37.5,50.75 48,50.75 48,37.75 37.5,37.75
Bottom Layer:
  rectangle net GND: 60.075,17.3 66.2,18.729
  rectangle net GND: 67.175,17.446 70.35,18.675
  pour cut-out: 43.35,85.575 41.725,83.95 40.925,83.95 40.925,82.85 49.275,74.5 51.975,74.5 52.1,74.375 52.643,74.918 52.643,78.057 51.05,79.65 48.1,79.65 44.225,84.85
  pour cut-out: 14.876,96.899 8.899,96.899 0.024,96.899 0.024,0.158 0,0.134 0.134,0 14.876,0

## Silkscreen, mask and mechanical layers (free items; w line width, h text height)
Top Overlay:
  drawing of 57 lines, arcs and shapes, not listed
  text "XS1" at 152.371,83.679 h2 r45
  text "V" at 86.25,-19.25 h8
  text "411522.033" at 186.5,-21.775 h5 r90
  text "758727.205-2" at 181.5,-22.25 h5 r90
Bottom Overlay:
  text "4" at 111.25,106.5 h2
  text "1" at 122.75,106.5 h2
  text "1" at 65.25,73.75 h2
  text "2" at 67.498,73.75 h2
  text "8" at 225.5,36 h2
  text "2" at 182.748,25 h2
  text "1" at 182.75,22.75 h2
  text "NetTie" at 68.6,15.525 h2
  text "1" at 225.5,13.5 h2
Mechanical 1:
  circle w0.254: c122.5,-20 r1.5
  circle w0.2: c81.8,-20.3 r2.28
  circle w0.2: c150.525,87.86 r2.28
  circle w0.2: c65,-18.5 r1.724
  circle w0.2: c65,-26.5 r1.772
  circle w0.2: c182.661,11 r1.724
  circle w0.2: c152.467,79.15 r1.722
  circle w0.2: c157.475,82.4 r1.703
  circle w0.254: c83,-30 r1.5
  circle w0.254: c92,-20 r1.5
  circle w0.254: c161,-30 r1.5
  circle w0.254: c152.5,-20 r1.5
  circle w0.254: c122.5,2 r1.5
  circle w0.254: c161,13 r1.5
  circle w0.254: c92,2 r1.5
  circle w0.254: c83,13 r1.5
  circle w0.013: c3,89 r1.5
  circle w0.013: c3,89 r1.5
  circle w0.013: c3,9 r1.5
  lines w0.013: 0,110 0,0 40,0 40,-40 190,-40 190,0.086 230,0 230,110 ; 0,110 230,110 ; 0,110 230,110 ; 3.7,103.3 cw(c3.7,105) 3.7,106.7 6.3,106.7 cw(c6.3,105) 6.3,103.3 3.7,103.3 ; 43.673,-33.7 cw(c43.673,-32) 43.673,-30.3 46.273,-30.3 cw(c46.273,-32) 46.273,-33.7 43.673,-33.7 ; 183.727,-33.7 cw(c183.727,-32) 183.727,-30.3 186.327,-30.3 cw(c186.327,-32) 186.327,-33.7 183.727,-33.7 ; 223.7,3.3 cw(c223.7,5) 223.7,6.7 226.3,6.7 cw(c226.3,5) 226.3,3.3 223.7,3.3 ; 223.7,103.309 cw(c223.7,105.009) 223.7,106.709 226.3,106.709 cw(c226.3,105.009) 226.3,103.309 223.7,103.309
  lines w0.3: 83.598,-26.5 83.924,-26.5 89,-21.424 ; 85,-22.5 86.462,-23.962 ; 96.128,-19.872 99.5,-19.872 ; 96.128,2.116 99.5,2.116 ; 113,-20 118.098,-20 ; 113.402,2.018 118.5,2.018 ; 118,-29.9 121.034,-29.9 121.034,-26.866 121.034,-25.553 121.034,-24 ; 118,13.021 118.979,13.021 121,13.021 121,7.5 ; 123.466,7.5 123.466,9.053 123.466,10.366 123.466,13.021 ; 123.466,12.997 126.161,12.997 ; 123.5,-24 123.5,-30 126,-30 ; 126.303,-20 132,-20 ; 126.5,2 132,2 ; 146.5,2.065 148.615,2.065 ; 156.5,-22.207 160.5,-26.207 160.5,-26.5 ; 157,4.707 161,8.707 161,9
  lines w0.35: 20,16.25 220,16.25 ; 22.25,55.75 22.25,50 33.5,38.75 ; 33.352,38.898 cw(c31.184,36.73) 34.25,36.73 34.25,30.52 ccw(c37.316,30.52) 35.148,28.352 41.102,22.398 ccw(c43.27,24.566) 43.27,21.5 219.75,21.5 ; 172.52,16.25 219.75,16.25

## Text inside footprints (layer, text, board x,y; h text height)
C60: Top Overlay "+" at 218.165,26.527 h2 r90
C61: Top Overlay "+" at 22.7,60.5 h2
C62: Top Overlay "+" at 220.665,30.627 h2 r270
C63: Top Overlay "+" at 20.3,18.75 h2 r180